# EAGLE board gripper (EAGLE 6.2)
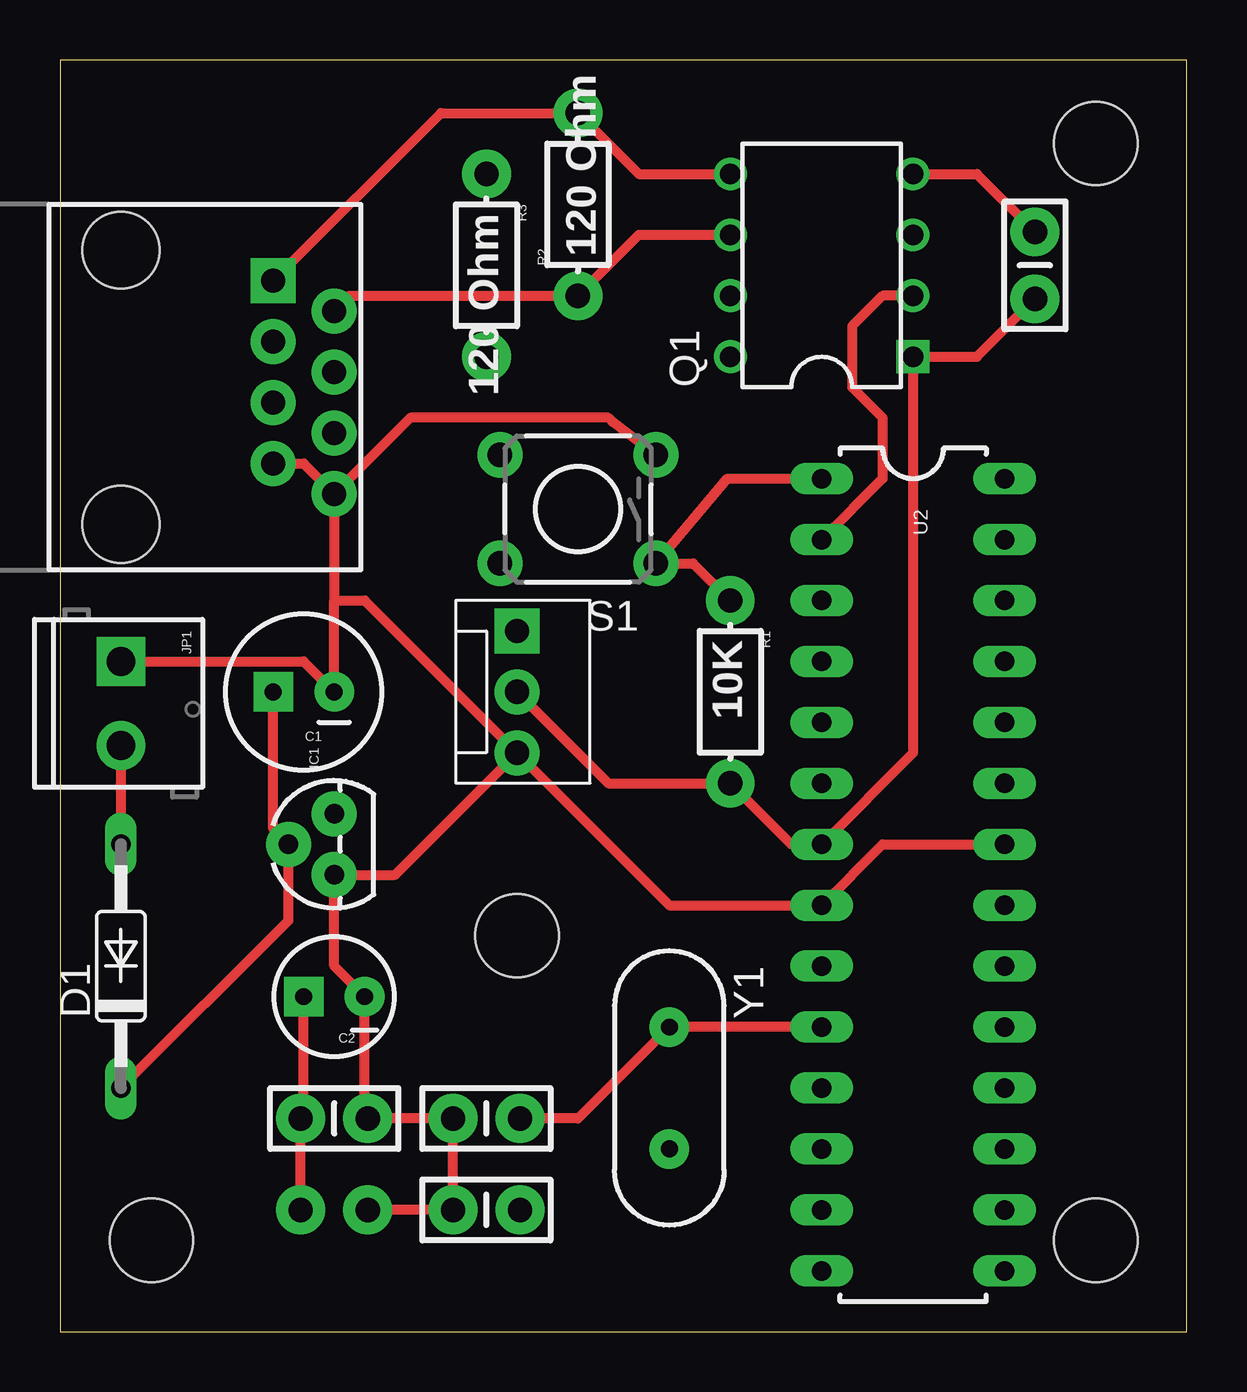
[diagram p0: board, top side]
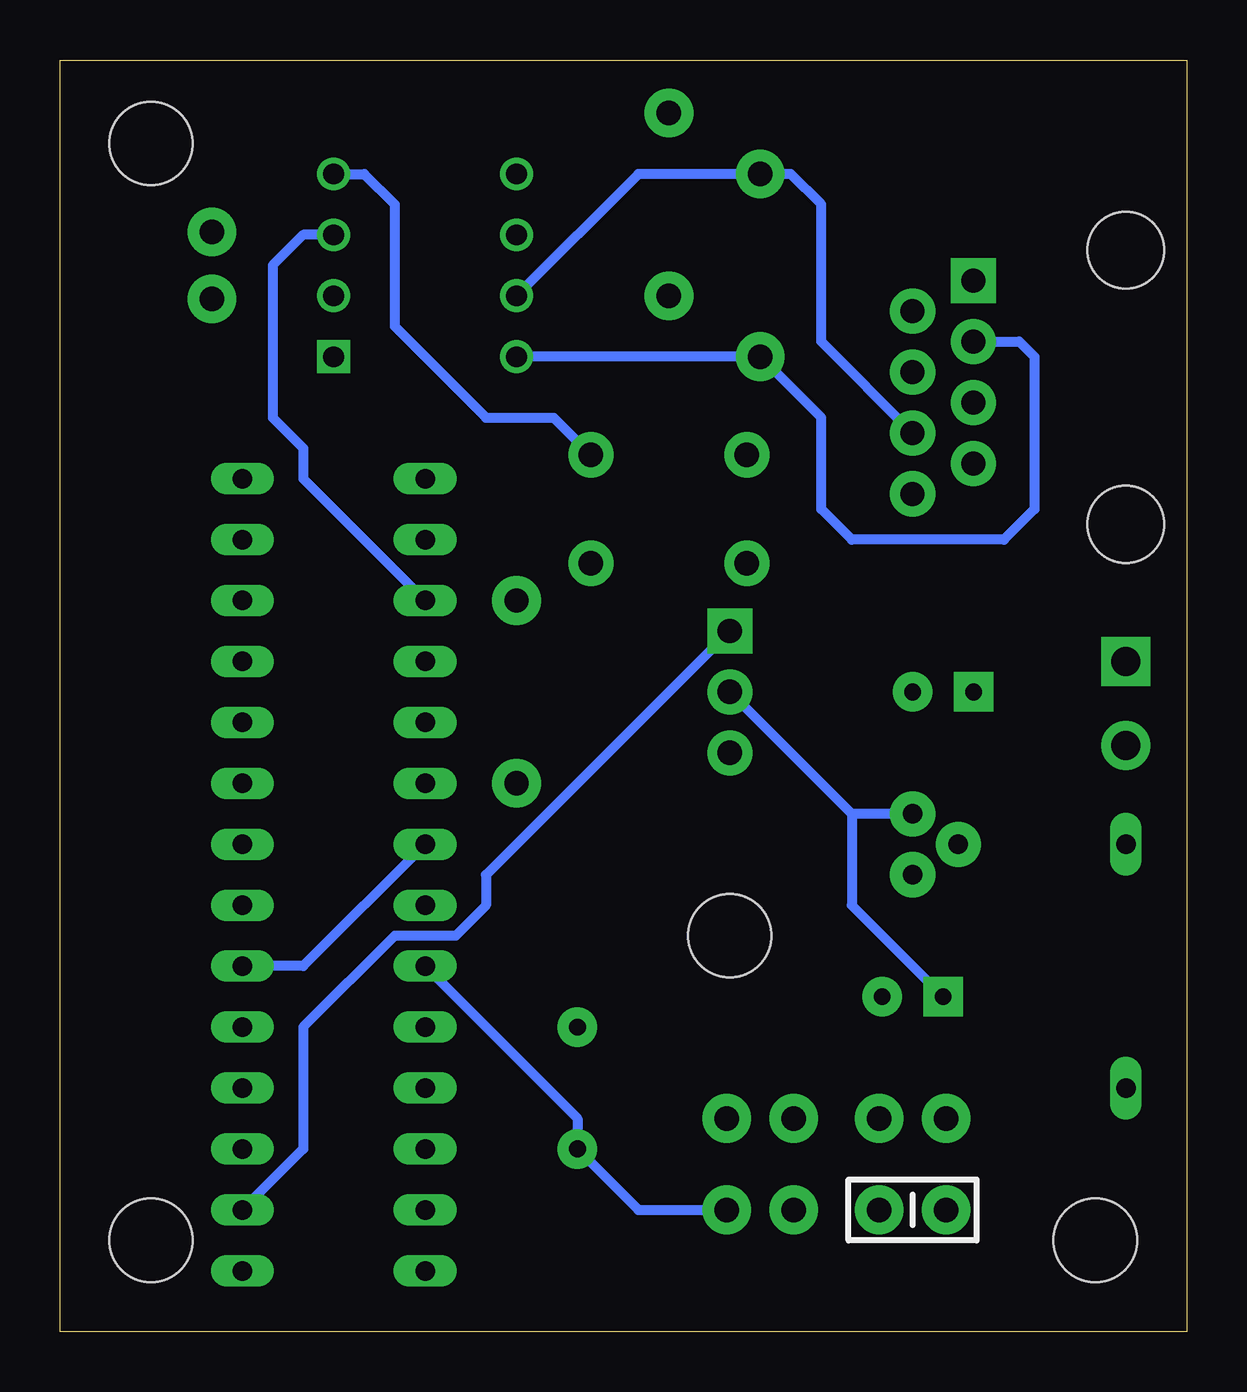
[diagram p1: board, bottom side, seen from below]

Size 46.97 x 53.01 mm. Coordinates in mm from the lower left corner, seen from the top.
Outline: 0,0 46.97,0 46.97,53.01 0,53.01 0,0
Copper layers (1*16): Top 0.035mm / dielectric 1.5mm / Bottom 0.035mm
Design rules: minimum track width 10mil, minimum drill 24mil, track to track 8mil, track to pad 8mil, pad to pad 8mil, via to via 8mil, smd to smd 8mil, copper to edge 40mil, drill to drill 8mil, minimum pad ring 10mil, minimum via ring 8mil, stop-mask expansion 4mil, vias tented up to drill 0mil, thermal gap 10mil
Holes 3.47 mm at 3.81,3.81 19.05,16.51 43.18,3.81 43.18,49.53

## Footprints (pad centres in the part's own frame; a part is rotated, then mirrored left to right if it is on the bottom)
CPOL-RADIAL-100UF-25V = drill 0.7 pad 1.651 square: 1 1.27,0 | drill 0.7 pad 1.651: 2 -1.27,0
CPOL-RADIAL-10UF-25V = drill 0.7 pad 1.651 square: 1 1.27,0 | drill 0.7 pad 1.651: 2 -1.27,0
CAP-PTH-SMALL-KIT = drill 1.016 pad 2.032: 1 -1.397,0; 2 1.397,0
DO35-10 = drill 0.813 long: A 5.08,0; C -5.08,0
TO-92 = drill 0.813 pad 1.88: 1 -1.27,0; 2 0,1.905; 3 1.27,0
SCREWTERMINAL-3.5MM-2 = drill 1.2 pad 2.032 square: 1 0,0 | drill 1.2 pad 2.032: 2 3.5,0
MOLEX-1X3 = drill 1.016 pad 1.88 square: 1 0,0 | drill 1.016 pad 1.88: 2 2.54,0; 3 5.08,0
DIP8 = drill 0.864 square: 1 -3.81,-3.81 | drill 0.864: 2 -1.27,-3.81; 3 1.27,-3.81; 4 3.81,-3.81; 5 3.81,3.81; 6 1.27,3.81; 7 -1.27,3.81; 8 -3.81,3.81
AXIAL-0.3-KIT = drill 1.016 pad 2.032: P$1 -3.81,0; P$2 3.81,0
TACTILE-PTH = drill 1.016 pad 1.88: 1 -3.251,2.261; 2 3.251,2.261; 3 -3.251,-2.261; 4 3.251,-2.261
DIL28-3 = drill 0.813 long: 1 -16.51,-3.81; 2 -13.97,-3.81; 3 -11.43,-3.81; 4 -8.89,-3.81; 5 -6.35,-3.81; 6 -3.81,-3.81; 7 -1.27,-3.81; 8 1.27,-3.81; 9 3.81,-3.81; 10 6.35,-3.81; 11 8.89,-3.81; 12 11.43,-3.81; 13 13.97,-3.81; 14 16.51,-3.81; 15 16.51,3.81; 16 13.97,3.81; 17 11.43,3.81; 18 8.89,3.81; 19 6.35,3.81; 20 3.81,3.81; 21 1.27,3.81; 22 -1.27,3.81; 23 -3.81,3.81; 24 -6.35,3.81; 25 -8.89,3.81; 26 -11.43,3.81; 27 -13.97,3.81; 28 -16.51,3.81
RJ45-8 = drill 1 pad 1.88 square: 1 -4.445,6.35 | drill 1 pad 1.88: 2 -3.175,8.89; 3 -1.905,6.35; 4 -0.635,8.89; 5 0.635,6.35; 6 1.905,8.89; 7 3.175,6.35; 8 4.445,8.89 | hole 3.2: -5.715,0; 5.715,0
HC49US = drill 0.7 pad 1.651: 1 -2.54,0; 2 2.54,0

## Placement (x,y rotation side)
C1  100uF  [CPOL-RADIAL-100UF-25V]  10.16,26.67 180 top
C2  10uF  [CPOL-RADIAL-10UF-25V]  11.43,13.97 180 top
C3  .1uF  [CAP-PTH-SMALL-KIT]  11.43,5.08 0 bottom
C4  22pF  [CAP-PTH-SMALL-KIT]  17.78,5.08 180 top
C5  22pF  [CAP-PTH-SMALL-KIT]  17.78,8.89 180 top
C6  .01uF  [CAP-PTH-SMALL-KIT]  11.43,8.89 180 top
C7  .1uF  [CAP-PTH-SMALL-KIT]  40.64,44.45 270 top
D1  1N4446  [DO35-10]  2.54,15.24 90 top
IC1  [TO-92]  11.43,20.32 90 top
JP1  M023.5MM  [SCREWTERMINAL-3.5MM-2]  2.54,27.94 270 top
JP2  [MOLEX-1X3]  19.05,29.21 270 top
Q1  Q_LTC490  [DIP8]  31.75,44.45 90 top
R1  10K  [AXIAL-0.3-KIT]  27.94,26.67 270 top
R2  120 Ohm  [AXIAL-0.3-KIT]  21.59,46.99 90 top
R3  120 Ohm  [AXIAL-0.3-KIT]  17.78,44.45 270 top
S1  SWITCH-MOMENTARY-2PTH  [TACTILE-PTH]  21.59,34.29 180 top
U2  ATMEGA328P_PDIP  [DIL28-3]  35.56,19.05 270 top
U$1  RJ45-8PTH  [RJ45-8]  2.54,39.37 270 top
Y1  16MHz  [HC49US]  25.4,10.16 270 top

## Library data of the parts
C1 C2 R1-R3 = SparkFun-Passives
C3-C7 = SparkFun-Capacitors
D1 = diode
IC1 = SparkFun-PowerIC
JP1 JP2 U$1 = SparkFun-Connectors
Q1 = PCB0M1
S1 = SparkFun-Electromechanical
U2 = SparkFun-DigitalIC
Y1 = SparkFun-FreqCtrl

## Nets
GND: C1.2 C2.2 C3.1 C4.2 C5.2 C6.1 C7.1 IC1.1 JP1.1 JP2.3 Q1.4 S1.3 U2.8 U2.22 U$1.7 U$1.8
N$1: D1.A JP1.2
N$2: C1.1 D1.C IC1.2
N$3: C2.1 C3.2 C6.2 C7.2 IC1.3 JP2.2 Q1.1 R1.P$2 U2.7 U2.20
N$4: R1.P$1 S1.1 U2.1
N$5: Q1.5 R2.P$2 U$1.1
N$6: C4.1 U2.9 Y1.2
N$7: C5.1 U2.10 Y1.1
N$8: JP2.1 U2.16
N$9: Q1.2 U2.2
N$10: Q1.3 U2.3
N$11: Q1.8 R3.P$2 U$1.3
N$12: Q1.6 R2.P$1 U$1.2
N$13: Q1.7 R3.P$1 U$1.6

## Tracks (layer width: path | path; a pad name or v marks a point on that pad's centre or on a via)
GND
  Top 0.406: U$1.7 10.16,36.2 U$1.8 | U$1.8 11.43,30.48 | U2.22 34.29,20.32 U2.8 25.4,17.78 JP2.3 | S1.3 23.03,37.94 22.86,38.1 14.61,38.1 U$1.8 | 11.43,30.48 12.7,30.48 JP2.3 | C3.1 C4.2 C5.2 C6.1 12.7,9.02 C2.2 11.43,15.24 IC1.1 13.97,19.05 JP2.3 | 11.43,30.48 C1.2 10.16,27.94 JP1.1 | Q1.4 38.23,48.26 C7.1
  Bottom 0.406: Q1.4 34.29,48.26 33.02,46.99 33.02,41.91 29.21,38.1 26.39,38.1 S1.3
N$1
  Top 0.406: JP1.2 D1.A
N$2
  Top 0.406: D1.C 9.53,17.15 IC1.2 8.89,20.95 C1.1
N$3
  Top 0.406: C3.2 C6.2 10.16,9.02 C2.1 | JP2.2 22.86,22.86 R1.P$2 30.48,20.32 U2.7 35.56,24.13 Q1.1 38.23,40.64 C7.2
  Bottom 0.406: U2.7 36.83,15.24 U2.20 | JP2.2 13.97,21.59 | IC1.3 13.97,21.59 | 13.97,21.59 13.97,17.78 C2.1
N$4
  Top 0.406: U2.1 27.82,35.56 S1.1 26.39,32.03 R1.P$1
N$5
  Top 0.406: U$1.1 15.88,50.8 R2.P$2 24.13,48.26 Q1.5
N$6
  Bottom 0.406: U2.9 25.4,8.89 Y1.2 22.86,5.08 C4.1
N$7
  Top 0.406: U2.10 Y1.1 21.59,8.89 C5.1
N$8
  Bottom 0.406: U2.16 36.83,7.62 36.83,12.7 33.02,16.51 30.48,16.51 29.21,17.78 29.21,19.05 JP2.1
N$9
  Top 0.406: Q1.2 34.29,43.18 33.02,41.91 33.02,39.37 34.29,38.1 34.29,35.56 U2.2
N$10
  Bottom 0.406: Q1.3 36.83,45.72 38.1,44.45 38.1,38.1 36.83,36.83 36.83,35.56 U2.3
N$11
  Bottom 0.406: U$1.3 6.99,41.27 6.35,40.64 6.35,34.29 7.62,33.02 13.97,33.02 15.24,34.29 15.24,38.1 R3.P$2 Q1.8
N$12
  Top 0.406: U$1.2 12.07,43.18 R2.P$1 24.13,45.72 Q1.6
N$13
  Bottom 0.406: U$1.6 15.24,41.27 15.24,46.99 16.51,48.26 R3.P$1 22.86,48.26 Q1.7